# EAGLE board Daughter Card v6 (EAGLE 8.0.2), part 1 of 2
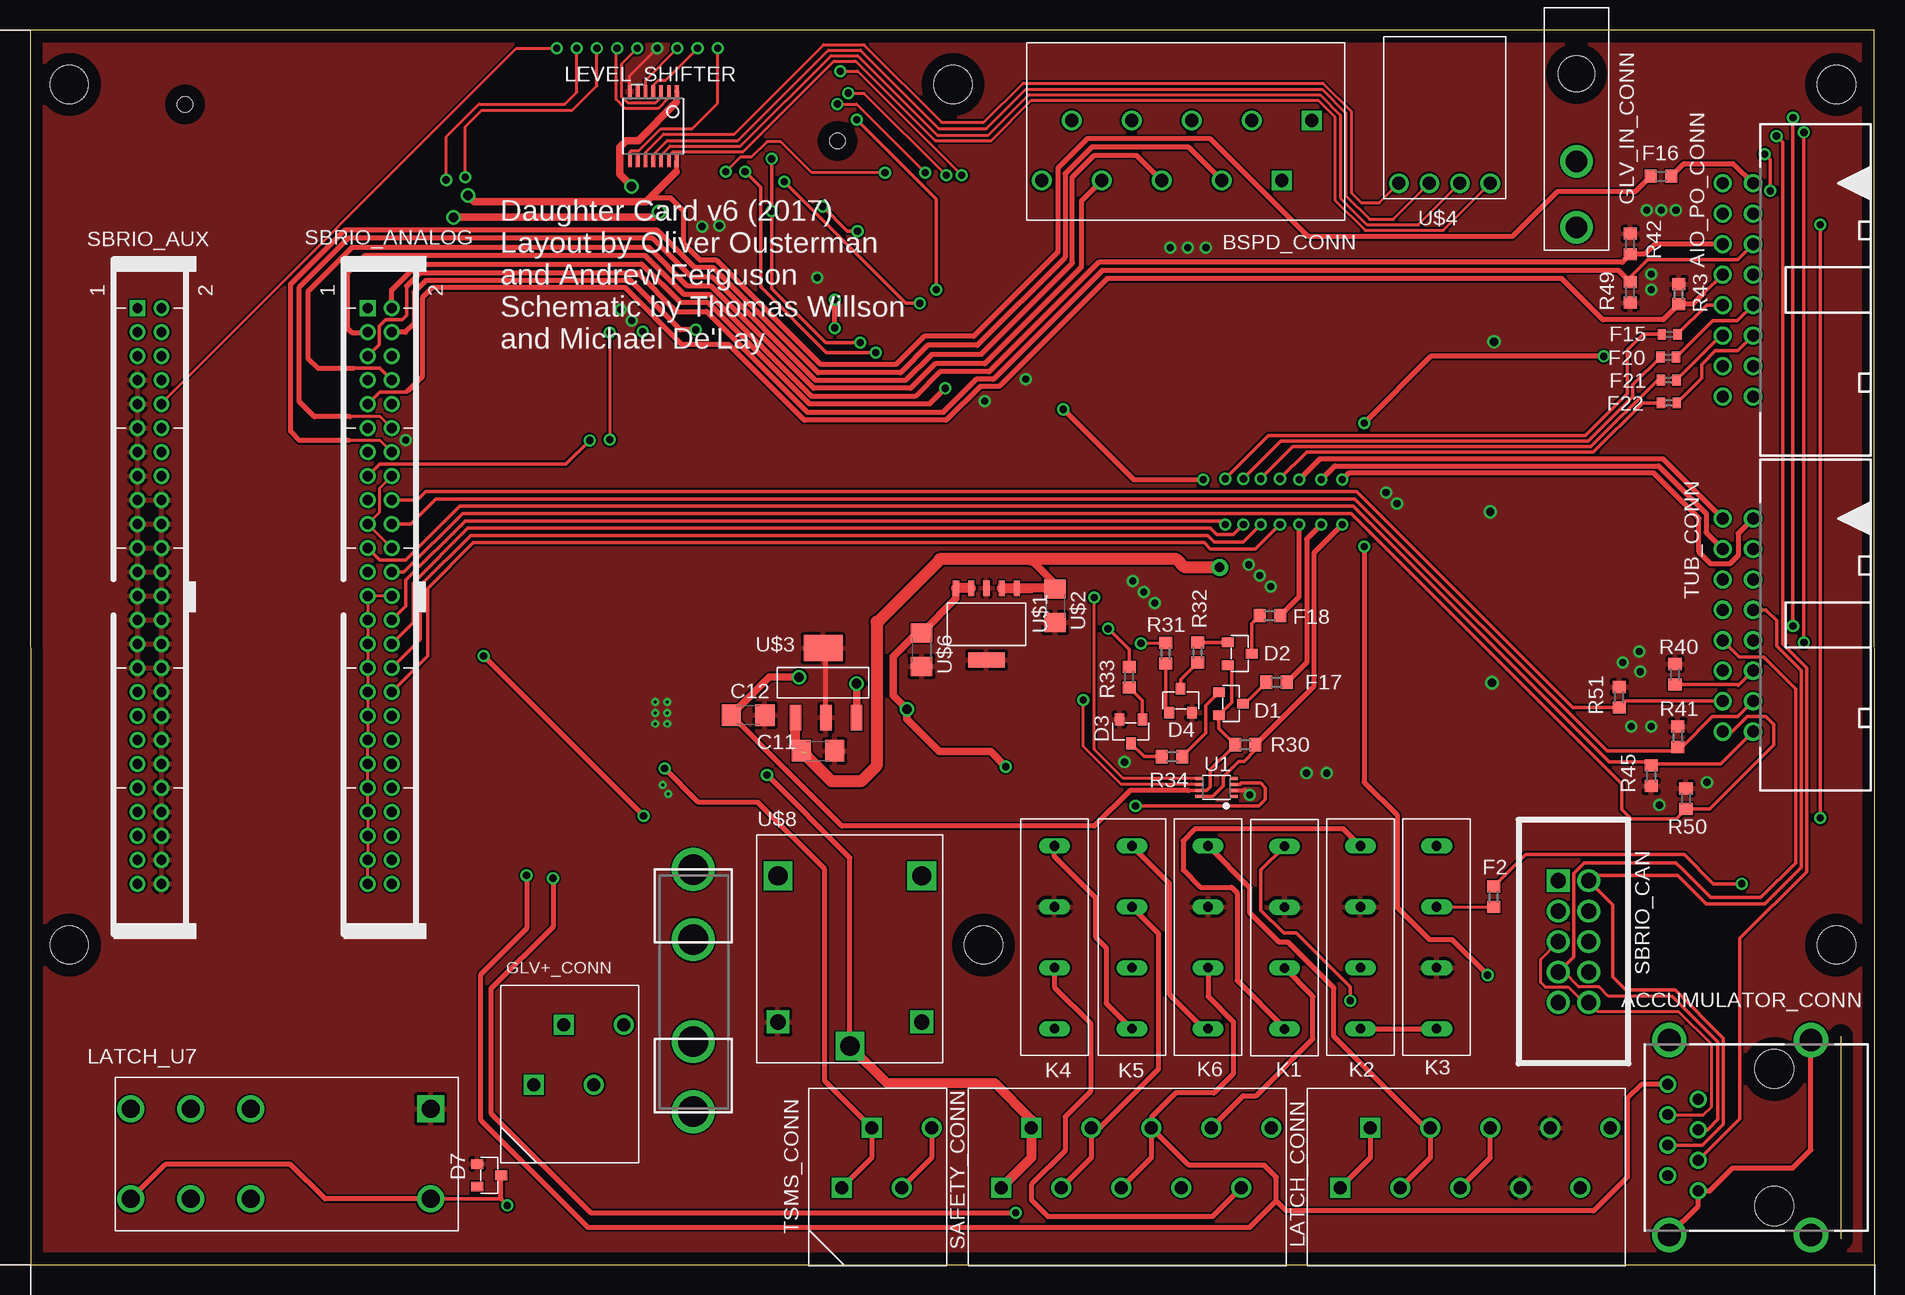
[diagram p0: board, top side]
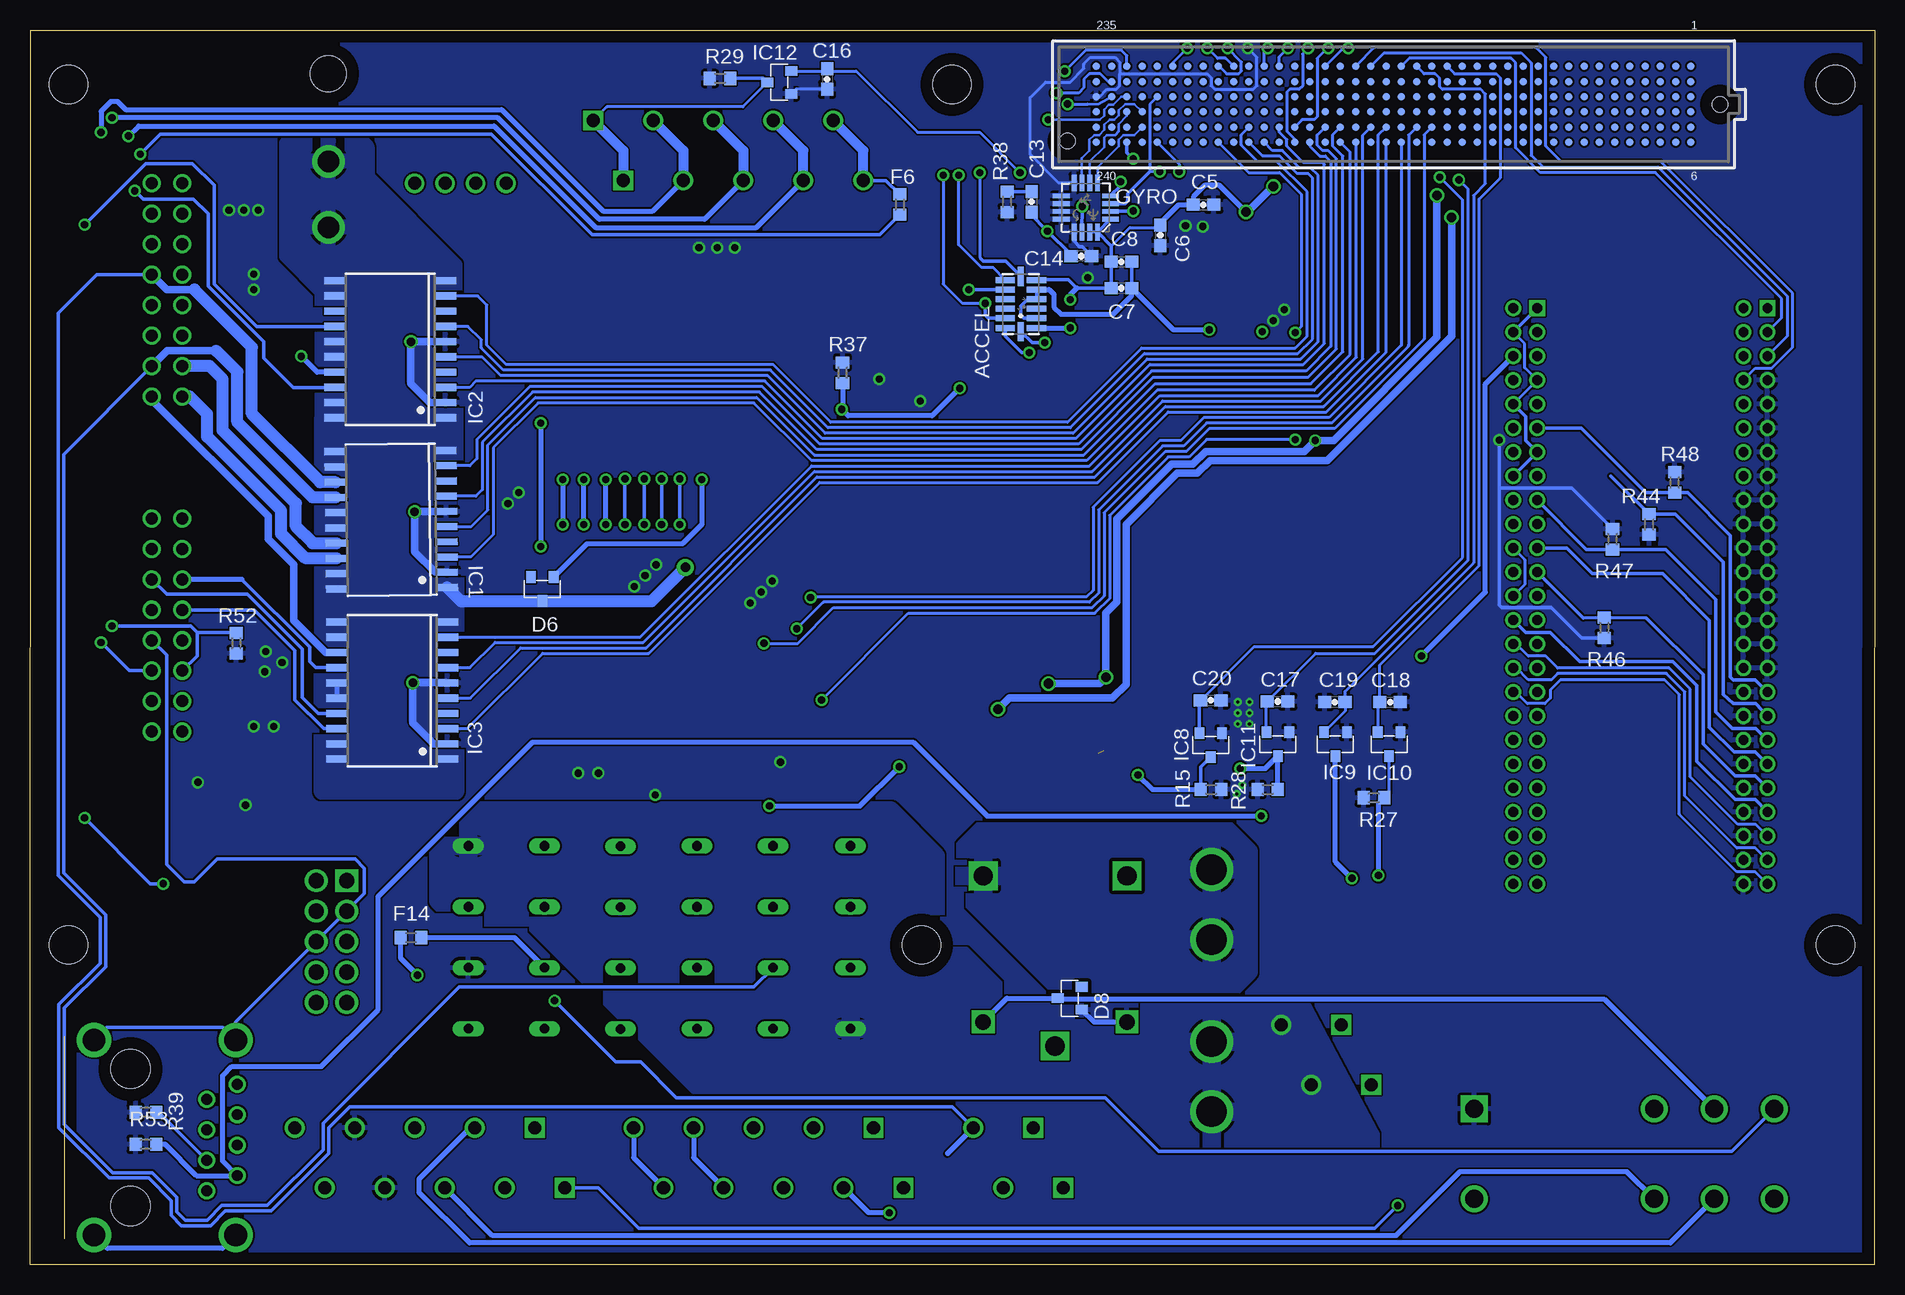
[diagram p1: board, bottom side, seen from below]

Size 153.75 x 102.95 mm. Coordinates in mm from the lower left corner, seen from the top.
Outline: 0.08,0 153.75,0 153.67,102.95 0,102.95 0.08,0
Copper layers (1*16): Top 0.035mm / dielectric 1.5mm / Bottom 0.035mm
Design rules "default *": minimum track width 8mil, minimum drill 13mil, track to track 6mil, track to pad 6mil, pad to pad 6mil, via to via 6mil, smd to smd 6mil, copper to edge 40mil, drill to drill 8mil, minimum pad ring 10mil, minimum via ring 8mil, stop-mask expansion 0mil, vias tented up to drill 0mil, thermal gap 10mil
Holes 3.17 mm at 3.28,98.4 76.91,98.4 150.55,98.4 150.55,26.67 79.45,26.67 3.28,26.67

## Footprints (pad centres in the part's own frame; a part is rotated, then mirrored left to right if it is on the bottom)
LGA14 = smd 0.5 x 1.6: 1 2,1.3; 2 1.2,1.3; 3 0.4,1.3; 4 -0.4,1.3; 5 -1.2,1.3; 6 -2,1.3; 8 -2,-1.3; 9 -1.2,-1.3; 10 -0.4,-1.3; 11 0.4,-1.3; 12 1.2,-1.3; 13 2,-1.3 | smd 1.6 x 0.5: 7 -2.3,0; 14 2.3,0
RJ45-SHIELD1 = drill 0.9 pad 1.4: 1 -4.445,6.35; 2 -3.175,8.89; 3 -1.905,6.35; 4 -0.635,8.89; 5 0.635,6.35; 6 1.905,8.89; 7 3.175,6.35; 8 4.445,8.89 | drill 1.9 pad 2.5: S1 -8.128,-3.048; S2 8.128,-3.048; S3 -8.128,8.76; S4 8.128,8.76 | hole 3.251: -5.715,0; 5.715,0
PAK100/2500-5-16 = drill 1 pad 1.422: 1 -8.89,-1.27; 2 -8.89,1.27; 3 -6.35,-1.27; 4 -6.35,1.27; 5 -3.81,-1.27; 6 -3.81,1.27; 7 -1.27,-1.27; 8 -1.27,1.27; 9 1.27,-1.27; 10 1.27,1.27; 11 3.81,-1.27; 12 3.81,1.27; 13 6.35,-1.27; 14 6.35,1.27; 15 8.89,-1.27; 16 8.89,1.27
CONNECTOR_5 = drill 1.1 square: 1 0,0; 2 2.5,5 | drill 1.1: 3 5,0; 4 7.5,5; 5 10,0; 6 12.5,5; 7 15,0; 8 17.5,5; 9 20,0; 10 22.5,5
0603-CAP = smd 1.1 x 1: 1 -0.85,0; 2 0.85,0
C1206 = smd 1.6 x 1.8: 1 -1.4,0; 2 1.4,0
SOT-23-3 = smd 0.8 x 0.976: P$1 0,1; P$2 -0.95,-1; P$3 0.95,-1
R0603 = smd 1 x 1.1: 1 -0.85,0; 2 0.85,0
FUSE_5MM = drill 2.54 pad 3.556: 1 0,-10.1; 2 0,-4.258; 3 0,4.258; 4 0,10.1
R0402 = smd 0.7 x 0.9: 1 -0.65,0; 2 0.65,0
CONNECTOR_2 = drill 1.1 square: 1 0,0; 2 2.5,5 | drill 1.1: 3 5,0; 4 7.5,5
MOLEX_39-30-1020 = drill 1.8: 1 0,0; 2 0,5.5 | hole 3: 0,-7.3
LGA16-4X4 = smd 1.4 x 0.4: 1 -2.05,0.975; 2 -2.05,0.325; 3 -2.05,-0.325; 4 -2.05,-0.975; 9 2.05,-0.975; 10 2.05,-0.325; 11 2.05,0.325; 12 2.05,0.975 | smd 0.4 x 1.4: 5 -0.975,-2.05; 6 -0.325,-2.05; 7 0.325,-2.05; 8 0.975,-2.05; 13 0.975,2.05; 14 0.325,2.05; 15 -0.325,2.05; 16 -0.975,2.05
PG-DSO-20 = smd 0.6 x 1.8: 1 -5.715,-4.6; 2 -4.445,-4.6; 3 -3.175,-4.6; 4 -1.905,-4.6; 5 -0.635,-4.6; 6 0.635,-4.6; 7 1.905,-4.6; 8 3.175,-4.6; 9 4.445,-4.6; 10 5.715,-4.6; 11 5.715,4.6; 12 4.445,4.6; 13 3.175,4.6; 14 1.905,4.6; 15 0.635,4.6; 16 -0.635,4.6; 17 -1.905,4.6; 18 -3.175,4.6; 19 -4.445,4.6; 20 -5.715,4.6
HE3621A1250_SPST = drill 0.8 long: C+ -2.54,0; C- 2.54,0; S1 -7.62,0; S2 7.62,0
DPDT_JW2_FORM_C = drill 1.5: CENTER_1 -8,3.75; CENTER_2 -8,-3.75; COIL_2 12,-3.75; NC_1 -3,3.75; NC_2 -3,-3.75; NO_1 -13,3.75; NO_2 -13,-3.75 | drill 1.5 square: COIL_1 12,3.75
TSSOP14 = smd 0.305 x 0.991: 1 -1.95,-2.918; 2 -1.3,-2.918; 3 -0.65,-2.918; 4 0,-2.918; 5 0.65,-2.918; 6 1.3,-2.918; 7 1.95,-2.918; 8 1.95,2.918; 9 1.3,2.918; 10 0.65,2.918; 11 0,2.918; 12 -0.65,2.918; 13 -1.3,2.918; 14 -1.95,2.918
SBRIO_J502_J503 = drill 0.8 square: P$1 0,0 | drill 0.8: P$2 0,2; P$3 2,0; P$4 2,2; P$5 4,0; P$6 4,2; P$7 6,0; P$8 6,2; P$9 8,0; P$10 8,2; P$11 10,0; P$12 10,2; P$13 12,0; P$14 12,2; P$15 14,0; P$16 14,2; P$17 16,0; P$18 16,2; P$19 18,0; P$20 18,2; P$21 20,0; P$22 20,2; P$23 22,0; P$24 22,2; P$25 24,0; P$26 24,2; P$27 26,0; P$28 26,2; P$29 28,0; P$30 28,2; P$31 30,0; P$32 30,2; P$33 32,0; P$34 32,2; P$35 34,0; P$36 34,2; P$37 36,0; P$38 36,2; P$39 38,0; P$40 38,2; P$41 40,0; P$42 40,2; P$43 42,0; P$44 42,2; P$45 44,0; P$46 44,2; P$47 46,0; P$48 46,2; P$49 48,0; P$50 48,2
SBRIO_W = drill 1.27 pad 1.778 square: P$1 -5.08,-1.27 | drill 1.27 pad 1.778: P$2 -5.08,1.27; P$3 -2.54,-1.27; P$4 -2.54,1.27; P$5 0,-1.27; P$6 0,1.27; P$7 2.54,-1.27; P$8 2.54,1.27; P$9 5.08,-1.27; P$10 5.08,1.27
SEAM-40-XX.X-XX-06-X-A = smd 0.635 x 0.635: 1 24.765,3.175; 2 24.765,1.905; 3 24.765,0.635; 4 24.765,-0.635; 5 24.765,-1.905; 6 24.765,-3.175; 7 23.495,3.175; 8 23.495,1.905; 9 23.495,0.635; 10 23.495,-0.635; 11 23.495,-1.905; 12 23.495,-3.175; 13 22.225,3.175; 14 22.225,1.905; 15 22.225,0.635; 16 22.225,-0.635; 17 22.225,-1.905; 18 22.225,-3.175; 19 20.955,3.175; 20 20.955,1.905; 21 20.955,0.635; 22 20.955,-0.635; 23 20.955,-1.905; 24 20.955,-3.175; 25 19.685,3.175; 26 19.685,1.905; 27 19.685,0.635; 28 19.685,-0.635; 29 19.685,-1.905; 30 19.685,-3.175; 31 18.415,3.175; 32 18.415,1.905; 33 18.415,0.635; 34 18.415,-0.635; 35 18.415,-1.905; 36 18.415,-3.175; 37 17.145,3.175; 38 17.145,1.905; 39 17.145,0.635; 40 17.145,-0.635; 41 17.145,-1.905; 42 17.145,-3.175; 43 15.875,3.175; 44 15.875,1.905; 45 15.875,0.635; 46 15.875,-0.635; 47 15.875,-1.905; 48 15.875,-3.175; 49 14.605,3.175; 50 14.605,1.905; 51 14.605,0.635; 52 14.605,-0.635; 53 14.605,-1.905; 54 14.605,-3.175; 55 13.335,3.175; 56 13.335,1.905; 57 13.335,0.635; 58 13.335,-0.635; 59 13.335,-1.905; 60 13.335,-3.175; 61 12.065,3.175; 62 12.065,1.905; 63 12.065,0.635; 64 12.065,-0.635; 65 12.065,-1.905; 66 12.065,-3.175; 67 10.795,3.175; 68 10.795,1.905; 69 10.795,0.635; 70 10.795,-0.635; 71 10.795,-1.905; 72 10.795,-3.175; 73 9.525,3.175; 74 9.525,1.905; 75 9.525,0.635; 76 9.525,-0.635; 77 9.525,-1.905; 78 9.525,-3.175; 79 8.255,3.175; 80 8.255,1.905; 81 8.255,0.635; 82 8.255,-0.635; 83 8.255,-1.905; 84 8.255,-3.175; 85 6.985,3.175; 86 6.985,1.905; 87 6.985,0.635; 88 6.985,-0.635; 89 6.985,-1.905; 90 6.985,-3.175; 91 5.715,3.175; 92 5.715,1.905; 93 5.715,0.635; 94 5.715,-0.635; 95 5.715,-1.905; 96 5.715,-3.175; 97 4.445,3.175; 98 4.445,1.905; 99 4.445,0.635; 100 4.445,-0.635; 101 4.445,-1.905; 102 4.445,-3.175; 103 3.175,3.175; 104 3.175,1.905; 105 3.175,0.635; 106 3.175,-0.635; 107 3.175,-1.905; 108 3.175,-3.175; 109 1.905,3.175; 110 1.905,1.905; 111 1.905,0.635; 112 1.905,-0.635; 113 1.905,-1.905; 114 1.905,-3.175; 115 0.635,3.175; 116 0.635,1.905; 117 0.635,0.635; 118 0.635,-0.635; 119 0.635,-1.905; 120 0.635,-3.175; 121 -0.635,3.175; 122 -0.635,1.905; 123 -0.635,0.635; 124 -0.635,-0.635; 125 -0.635,-1.905; 126 -0.635,-3.175; 127 -1.905,3.175; 128 -1.905,1.905; 129 -1.905,0.635; 130 -1.905,-0.635; 131 -1.905,-1.905; 132 -1.905,-3.175; 133 -3.175,3.175; 134 -3.175,1.905; 135 -3.175,0.635; 136 -3.175,-0.635; 137 -3.175,-1.905; 138 -3.175,-3.175; 139 -4.445,3.175; 140 -4.445,1.905; 141 -4.445,0.635; 142 -4.445,-0.635; 143 -4.445,-1.905; 144 -4.445,-3.175; 145 -5.715,3.175; 146 -5.715,1.905; 147 -5.715,0.635; 148 -5.715,-0.635; 149 -5.715,-1.905; 150 -5.715,-3.175; 151 -6.985,3.175; 152 -6.985,1.905; 153 -6.985,0.635; 154 -6.985,-0.635; 155 -6.985,-1.905; 156 -6.985,-3.175; 157 -8.255,3.175; 158 -8.255,1.905; 159 -8.255,0.635; 160 -8.255,-0.635; 161 -8.255,-1.905; 162 -8.255,-3.175; 163 -9.525,3.175; 164 -9.525,1.905; 165 -9.525,0.635; 166 -9.525,-0.635; 167 -9.525,-1.905; 168 -9.525,-3.175; 169 -10.795,3.175; 170 -10.795,1.905; 171 -10.795,0.635; 172 -10.795,-0.635; 173 -10.795,-1.905; 174 -10.795,-3.175; 175 -12.065,3.175; 176 -12.065,1.905; 177 -12.065,0.635; 178 -12.065,-0.635; 179 -12.065,-1.905; 180 -12.065,-3.175; 181 -13.335,3.175; 182 -13.335,1.905; 183 -13.335,0.635; 184 -13.335,-0.635; 185 -13.335,-1.905; 186 -13.335,-3.175; 187 -14.605,3.175; 188 -14.605,1.905; 189 -14.605,0.635; 190 -14.605,-0.635; 191 -14.605,-1.905; 192 -14.605,-3.175; 193 -15.875,3.175; 194 -15.875,1.905; 195 -15.875,0.635; 196 -15.875,-0.635; 197 -15.875,-1.905; 198 -15.875,-3.175; 199 -17.145,3.175; 200 -17.145,1.905; 201 -17.145,0.635; 202 -17.145,-0.635; 203 -17.145,-1.905; 204 -17.145,-3.175; 205 -18.415,3.175; 206 -18.415,1.905; 207 -18.415,0.635; 208 -18.415,-0.635; 209 -18.415,-1.905; 210 -18.415,-3.175; 211 -19.685,3.175; 212 -19.685,1.905; 213 -19.685,0.635; 214 -19.685,-0.635; 215 -19.685,-1.905; 216 -19.685,-3.175; 217 -20.955,3.175; 218 -20.955,1.905; 219 -20.955,0.635; 220 -20.955,-0.635; 221 -20.955,-1.905; 222 -20.955,-3.175; 223 -22.225,3.175; 224 -22.225,1.905; 225 -22.225,0.635; 226 -22.225,-0.635; 227 -22.225,-1.905; 228 -22.225,-3.175; 229 -23.495,3.175; 230 -23.495,1.905; 231 -23.495,0.635; 232 -23.495,-0.635; 233 -23.495,-1.905; 234 -23.495,-3.175; 235 -24.765,3.175; 236 -24.765,1.905; 237 -24.765,0.635; 238 -24.765,-0.635; 239 -24.765,-1.905; 240 -24.765,-3.175 | hole 1.27: 27.191,0; -27.191,-3.048
VFSOP-8 = smd 0.25 x 0.65: P$1 -0.75,-1.45; P$2 -0.25,-1.45; P$3 0.25,-1.45; P$4 0.75,-1.45; P$5 0.75,1.45; P$6 0.25,1.45; P$7 -0.25,1.45; P$8 -0.75,1.45
TPS7A4533 = smd 0.508 x 1.27: P$1 -2.54,-2.997; P$2 -1.27,-2.997; P$3 0,-2.997; P$4 1.27,-2.997; P$5 2.54,-2.997 | smd 3.048 x 1.27: P$6 0,2.997
SOT-223-4 = smd 0.95 x 2.15: 1 -2.3,-2.9; 2 0.24,-2.9; 3 2.78,-2.9 | smd 3.25 x 2.15: 4 0,2.9
MOLEX_70553-0038 = drill 1.09: 1 -3.81,0; 2 -1.27,0; 3 1.27,0; 4 3.81,0
RELAY = drill 1.6 square: A 14.199,-5.994; B 14.199,5.994; CENTER 0,0 | drill 1.27 square: V1 2.007,5.994; V2 2.007,-5.994

## Placement (x,y rotation side)
ACCEL  ADXL345  [LGA14]  71.17,80.11 270 bottom
ACCUMULATOR_CONN  RJ45-6L21-S  [RJ45-SHIELD1]  145.36,10.62 90 top
AIO_PO_CONN  2516-5  [PAK100/2500-5-16]  142.32,81.28 270 top
BSPD_CONN  CONN_5  [CONNECTOR_5]  106.81,95.4 180 top
C5  .1uF  [0603-CAP]  55.96,88.37 0 bottom
C6  10uF  [0603-CAP]  59.56,85.83 270 bottom
C7  .1uF  [0603-CAP]  62.79,81.43 0 bottom
C8  1uF  [0603-CAP]  62.79,83.62 0 bottom
C11  0.1uF  [C1206]  65.66,42.85 0 top
C12  0.22uF  [C1206]  59.84,45.82 180 top
C13  470nF  [0603-CAP]  70.28,88.62 270 bottom
C14  10nF  [0603-CAP]  66.14,84.1 180 bottom
C16  1uF  [0603-CAP]  87.33,98.86 270 bottom
C17  1uF  [0603-CAP]  49.78,46.96 0 bottom
C18  1uF  [0603-CAP]  40.41,46.91 0 bottom
C19  1uF  [0603-CAP]  45.01,46.91 180 bottom
C20  1uF  [0603-CAP]  55.35,47.07 0 bottom
D1  MMBT4403-7-F  [SOT-23-3]  100.08,46.79 270 top
D2  MMBT4403-7-F  [SOT-23-3]  100.81,50.95 270 top
D3  MMBT4401-7-F  [SOT-23-3]  91.74,44.48 180 top
D4  MMBT4401-7-F  [SOT-23-3]  95.89,47.04 0 top
D6  MMBZ5238B-7-F  [SOT-23-3]  111.05,56.34 180 bottom
D7  DIODE_MMBD4448  [SOT-23-3]  38.28,7.47 270 top
D8  DIODE_MMBD4448  [SOT-23-3]  67.11,22.23 90 bottom
F2  250mA  [R0603]  121.97,30.68 270 top
F3  FUSEX20MM  [FUSE_5MM]  55.27,22.86 180 top
F6  250mA  [R0603]  81.25,88.39 270 bottom
F14  250mA  [R0603]  122,27.28 0 bottom
F15  10mA PTC  [R0402]  136.63,77.57 0 top
F16  0.5A PTC  [R0603]  135.92,90.75 0 top
F17  1A PTC  [R0603]  103.89,48.56 180 top
F18  1A PTC  [R0603]  103.33,54.13 180 top
F20  10mA PTC  [R0402]  136.53,75.67 0 top
F21  10mA PTC  [R0402]  136.55,73.76 0 top
F22  10mA PTC  [R0402]  136.58,71.86 0 top
GLV+_CONN  CONN_2  [CONNECTOR_2]  41.99,15.01 0 top
GLV_IN_CONN  39-30-1020  [MOLEX_39-30-1020]  128.88,92 180 top
GYRO  L3G4200D  [LGA16-4X4]  65.76,88.14 180 bottom
IC1  BTS716G  [PG-DSO-20]  123.65,62.13 90.7 bottom
IC2  BTS716G  [PG-DSO-20]  123.72,76.33 90 bottom
IC3  BTS716G  [PG-DSO-20]  123.57,47.88 90 bottom
IC8  MIC5225-3.3YM5-TR  [SOT-23-3]  55.35,43.33 180 bottom
IC9  MIC5225-3.3YM5-TR  [SOT-23-3]  44.96,43.41 180 bottom
IC10  MIC5225-3.3YM5-TR  [SOT-23-3]  40.49,43.41 180 bottom
IC11  MIC5225-3.3YM5-TR  [SOT-23-3]  49.76,43.41 180 bottom
IC12  MIC5225-3.3YM5-TR  [SOT-23-3]  91.31,98.58 90 bottom
K1  HE3621A1250_SPST  [HE3621A1250_SPST]  104.55,27.28 90 top
K2  HE3621A1250_SPST  [HE3621A1250_SPST]  110.87,27.3 90 top
K3  HE3621A1250_SPST  [HE3621A1250_SPST]  117.22,27.3 270 top
K4  HE3621A1250_SPST  [HE3621A1250_SPST]  85.37,27.3 90 top
K5  HE3621A1250_SPST  [HE3621A1250_SPST]  91.82,27.3 90 top
K6  HE3621A1250_SPST  [HE3621A1250_SPST]  98.17,27.3 90 top
LATCH_CONN  CONN_5  [CONNECTOR_5]  109.19,6.43 0 top
LATCH_U7  JW2SN-DC12V  [DPDT_JW2_FORM_C]  21.39,9.25 0 top
LEVEL_SHIFTER  [TSSOP14]  51.94,94.92 180 top
R15  10K  [R0603]  55.32,39.62 0 bottom
R27  10K  [R0603]  41.76,38.94 180 bottom
R28  10K  [R0603]  50.6,39.62 180 bottom
R29  10K  [R0603]  96.24,98.91 180 bottom
R30  4.7K  [R0603]  101.27,43.36 180 top
R31  4.7K  [R0603]  94.64,50.98 270 top
R32  4.7K  [R0603]  97.31,51.05 90 top
R33  4.7K  [R0603]  91.59,49 270 top
R34  4.7K  [R0603]  95.17,42.37 0 top
R37  10K  [R0603]  86.03,74.37 270 bottom
R38  10K  [R0603]  72.31,88.62 270 bottom
R39  100k  [R0603]  144.09,12.73 180 bottom
R40  100k  [R0603]  137.08,49.23 90 top
R41  100k  [R0603]  137.31,44.04 90 top
R42  100k  [R0603]  133.35,85.12 90 top
R43  100k  [R0603]  137.39,80.92 90 top
R44  100k  [R0603]  18.82,61.72 270 bottom
R45  100k  [R0603]  135.1,40.77 270 top
R46  100k  [R0603]  22.56,53.11 90 bottom
R47  100k  [R0603]  21.87,60.5 270 bottom
R48  100k  [R0603]  16.69,65.23 270 bottom
R49  100k  [R0603]  133.35,81.08 90 top
R50  100k  [R0603]  138,38.86 270 top
R51  100k  [R0603]  132.44,47.32 270 top
R52  100k  [R0603]  136.55,51.82 90 bottom
R53  100k  [R0603]  144.09,10.06 0 bottom
SAFETY_CONN  CONN_5  [CONNECTOR_5]  80.95,6.43 0 top
SBRIO_ANALOG  SBRIO_MIO  [SBRIO_J502_J503]  28.14,79.76 270 top
SBRIO_AUX  SBRIO_AUX  [SBRIO_J502_J503]  8.97,79.76 270 top
SBRIO_CAN  SBRIO_W500  [SBRIO_W]  128.63,26.95 270 top
SBRIO_MEZZANINE  SBRIO_RMC  [SEAM-40-XX.X-XX-06-X-A]  40.11,96.75 0 bottom
TSMS_CONN  CONN_2  [CONNECTOR_2]  67.64,6.43 0 top
TUB_CONN  2516-5  [PAK100/2500-5-16]  142.32,53.34 270 top
U1  [VFSOP-8]  98.88,39.8 90 top
U$1  TPS7A4533  [TPS7A4533]  79.71,53.42 180 top
U$2  [C1206]  85.42,54.94 270 top
U$3  LM340MP-5.0  [SOT-223-4]  66.09,48.51 0 top
U$4  70553-0038  [MOLEX_70553-0038]  117.88,90.17 180 top
U$6  [C1206]  74.3,51.28 270 top
U$8  RELAY  [RELAY]  68.33,18.24 90 top

## Library data of the parts
ACCEL GYRO = SparkFun-Sensors
ACCUMULATOR_CONN = con-tycoelectronics; OC_FARNELL: unknown; OC_NEWARK: unknown
AIO_PO_CONN TUB_CONN = con-3m; MPN: D2516-5002-AR; OC_FARNELL: 9838376; OC_NEWARK: 12P7055
BSPD_CONN D1-D4 D6-D8 GLV+_CONN K1-K6 LATCH_CONN LATCH_U7 SAFETY_CONN SBRIO_ANALOG SBRIO_AUX SBRIO_CAN TSMS_CONN U$8 = formula electric
C5-C8 C13 C14 C16-C20 F3 = SparkFun-Passives
C11 C12 U$2 U$6 = rcl
F2 F6 F14-F18 F20-F22 R15 R27-R34 R37-R53 = resistor
GLV_IN_CONN U$4 = molex
IC1-IC3 = infineon; OC_FARNELL: unknown; OC_NEWARK: unknown
IC8-IC12 = formula electric; DIGIKEYPN: MCP1703T-3302E/CBCT-ND
LEVEL_SHIFTER = SparkFun-DigitalIC
SBRIO_MEZZANINE = SEAM-40-XX.X-XX-06-X-A
U1 = adafruit
U$1 = Texas Instruments_By_element14_Batch_1; DIGIKEY_P-N: 490-12344-1-ND; P-N: GRT21BC81C106ME01L
U$3 = texas

## Nets
3.3V: ACCEL.1 ACCEL.6 C5.1 C6.1 C7.1 C8.1 GYRO.1 GYRO.15 GYRO.16 LEVEL_SHIFTER.1 U1.P$3 U$1.P$4 U$1.P$5 U$6.1
5V: C12.2 D1.P$3 D2.P$3 F16.1 LEVEL_SHIFTER.14 R30.2 SBRIO_ANALOG.P$15 U1.P$7 U$3.3
5V_IO_1: F17.1 TUB_CONN.3
12V: C11.1 D6.P$1 GLV_IN_CONN.1 GLV_IN_CONN.2 IC1.1 IC1.10 IC1.11 IC1.12 IC1.15 IC1.16 IC1.19 IC1.20 IC2.1 IC2.10 IC2.11 IC2.12 IC2.15 IC2.16 IC2.19 IC2.20 IC3.1 IC3.10 IC3.11 IC3.12 IC3.15 IC3.16 IC3.19 IC3.20 U$1.P$1 U$1.P$2 U$2.1 U$3.1
ACCUMULATOR_FANS: AIO_PO_CONN.15 IC1.18
AI7: R50.2 SBRIO_ANALOG.P$24 TUB_CONN.15
AI8: AIO_PO_CONN.5 R42.1 SBRIO_ANALOG.P$3
AI9: AIO_PO_CONN.6 R49.2 SBRIO_ANALOG.P$5
AI10: AIO_PO_CONN.7 R43.1 SBRIO_ANALOG.P$9
AI11: R48.2 SBRIO_ANALOG.P$11 SBRIO_AUX.P$33
AI12: R44.1 SBRIO_AUX.P$35
AI13: R47.2 SBRIO_ANALOG.P$17 SBRIO_AUX.P$37
AI15: R46.2 SBRIO_ANALOG.P$23 SBRIO_AUX.P$41
AMS_OK-: IC9.P$1 K5.C- SAFETY_CONN.3 SAFETY_CONN.4
AO0: F15.1 SBRIO_ANALOG.P$28 SBRIO_AUX.P$43
AO1: F20.1 SBRIO_ANALOG.P$30 SBRIO_AUX.P$45
AO2: F21.1 SBRIO_ANALOG.P$32 SBRIO_AUX.P$47
AO3: F22.1 SBRIO_ANALOG.P$34 SBRIO_AUX.P$49
BRAKE_PRESS_IN_1: BSPD_CONN.5 BSPD_CONN.6 R52.2 SBRIO_ANALOG.P$12 TUB_CONN.11
BRAKE_PRESS_IN_2: BSPD_CONN.3 BSPD_CONN.4 R40.1 SBRIO_ANALOG.P$14 TUB_CONN.12
BRAKELIGHT: IC3.17 TUB_CONN.6
BSPD_OK+: K4.C+ SAFETY_CONN.9 SAFETY_CONN.10
BSPD_OK_IN: BSPD_CONN.1 BSPD_CONN.2 IC12.P$1 R29.1
BUZZER_OUT: IC3.18 TUB_CONN.7
CAN_GND: ACCUMULATOR_CONN.1 ACCUMULATOR_CONN.S1 ACCUMULATOR_CONN.S2 ACCUMULATOR_CONN.S3 ACCUMULATOR_CONN.S4 SBRIO_CAN.P$3 SBRIO_CAN.P$6 TUB_CONN.10
CAN_H: ACCUMULATOR_CONN.5 SBRIO_CAN.P$7 TUB_CONN.9
CAN_L: ACCUMULATOR_CONN.4 SBRIO_CAN.P$2 TUB_CONN.8
COOLANT_PUMP: AIO_PO_CONN.13 IC1.17
DC_DC_DISABLE: F18.1 TUB_CONN.1
DIO0: ACCEL.14 GYRO.2 SBRIO_MEZZANINE.228
DIO1: C16.1 IC12.P$3 SBRIO_MEZZANINE.216
DIO2: SBRIO_MEZZANINE.210
DIO3: SBRIO_MEZZANINE.198
DIO4: SBRIO_MEZZANINE.192 U1.P$6
DIO5: IC2.7 SBRIO_MEZZANINE.180
DIO6: IC2.5 SBRIO_MEZZANINE.174
DIO7: C20.1 IC8.P$3 SBRIO_MEZZANINE.162
DIO8: IC1.9 SBRIO_MEZZANINE.156
DIO9: IC1.3 SBRIO_MEZZANINE.144
DIO10: IC3.9 SBRIO_MEZZANINE.138
DIO11: IC3.3 SBRIO_MEZZANINE.126
DIO12: SBRIO_MEZZANINE.120 U1.P$5
DIO13: SBRIO_MEZZANINE.108
DIO14: SBRIO_MEZZANINE.102
DIO15: SBRIO_MEZZANINE.90
DIO16: ACCEL.7 SBRIO_MEZZANINE.231
DIO17: ACCEL.9 SBRIO_MEZZANINE.225
DIO18: ACCEL.13 GYRO.3 SBRIO_MEZZANINE.213
DIO19: SBRIO_MEZZANINE.207
DIO20: SBRIO_MEZZANINE.195
DIO21: SBRIO_MEZZANINE.189
DIO22: SBRIO_MEZZANINE.177
DIO23: SBRIO_MEZZANINE.171
DIO24: SBRIO_MEZZANINE.159
DIO25: SBRIO_MEZZANINE.153
DIO26: SBRIO_MEZZANINE.141
DIO27: SBRIO_MEZZANINE.135
DIO28: SBRIO_MEZZANINE.123
DIO29: SBRIO_MEZZANINE.117
DIO30: SBRIO_MEZZANINE.105
DIO31: SBRIO_MEZZANINE.99
DIO32: GYRO.5 SBRIO_MEZZANINE.221
DIO33: SBRIO_MEZZANINE.215
DIO34: SBRIO_MEZZANINE.203
DIO35: SBRIO_MEZZANINE.197
DIO36: SBRIO_MEZZANINE.185
DIO37: IC2.9 SBRIO_MEZZANINE.179
DIO38: IC2.3 SBRIO_MEZZANINE.167
DIO39: C17.1 IC11.P$3 SBRIO_MEZZANINE.161
DIO40: IC1.7 SBRIO_MEZZANINE.149
DIO41: IC1.5 SBRIO_MEZZANINE.143
DIO42: IC3.7 SBRIO_MEZZANINE.131
DIO43: IC3.5 SBRIO_MEZZANINE.125
DIO44: R33.1 SBRIO_MEZZANINE.113
DIO45: R31.1 SBRIO_MEZZANINE.107
DIO48: ACCEL.8 SBRIO_MEZZANINE.230
DIO64: GYRO.6 SBRIO_MEZZANINE.226
DIO65: GYRO.7 SBRIO_MEZZANINE.220
DIO80: SBRIO_MEZZANINE.235
DIO81: ACCEL.12 GYRO.4 SBRIO_MEZZANINE.223
DIO82: SBRIO_MEZZANINE.217
DIO83: LEVEL_SHIFTER.8 SBRIO_MEZZANINE.205
DIO84: SBRIO_MEZZANINE.199
DIO85: LEVEL_SHIFTER.5 SBRIO_MEZZANINE.187
DIO86: LEVEL_SHIFTER.4 SBRIO_MEZZANINE.181
DIO87: LEVEL_SHIFTER.3 SBRIO_MEZZANINE.169
DIO88: LEVEL_SHIFTER.2 SBRIO_MEZZANINE.163
DIO89: SBRIO_AUX.P$12
DIO90: SBRIO_AUX.P$10 SBRIO_MEZZANINE.145
DIO91: SBRIO_AUX.P$8 SBRIO_MEZZANINE.133
DIO92: SBRIO_AUX.P$5 SBRIO_MEZZANINE.127
DIO93: SBRIO_AUX.P$3 SBRIO_MEZZANINE.115
DIO94: C19.1 IC9.P$3 SBRIO_MEZZANINE.109
DIO95: C18.1 IC10.P$3 SBRIO_MEZZANINE.97
DIO_GND: ACCEL.2 ACCEL.4 ACCEL.5 C7.2 C8.2 SBRIO_ANALOG.P$1 SBRIO_ANALOG.P$4 SBRIO_ANALOG.P$7 SBRIO_ANALOG.P$10 SBRIO_ANALOG.P$13 SBRIO_ANALOG.P$16 SBRIO_ANALOG.P$19 SBRIO_ANALOG.P$22 SBRIO_ANALOG.P$25 SBRIO_ANALOG.P$26 SBRIO_ANALOG.P$27 SBRIO_ANALOG.P$29 SBRIO_ANALOG.P$31 SBRIO_ANALOG.P$33 SBRIO_ANALOG.P$35 SBRIO_ANALOG.P$37 SBRIO_ANALOG.P$39 SBRIO_ANALOG.P$41 SBRIO_ANALOG.P$43 SBRIO_ANALOG.P$45 SBRIO_ANALOG.P$47 SBRIO_ANALOG.P$49
FAN_PWM_OUT: AIO_PO_CONN.16 IC3.13
GLV+: F3.3 F3.4 GLV+_CONN.3 GLV+_CONN.4 K3.S1 K4.S1
GND: C5.2 C6.2 C11.2 C12.1 C14.1 C16.2 C17.2 C18.2 C19.2 C20.2 D3.P$3 D4.P$3 D7.P$2 D8.P$2 GYRO.8 GYRO.9 GYRO.10 GYRO.11 GYRO.12 GYRO.13 IC1.2 IC1.6 IC2.2 IC2.6 IC3.2 IC3.6 IC8.P$2 IC9.P$2 IC10.P$2 IC11.P$2 IC12.P$2 K1.C- K2.C- K3.C- K4.C- K6.C- LATCH_CONN.7 LATCH_CONN.8 LATCH_U7.COIL_1 LEVEL_SHIFTER.7 R15.2 R27.2 R28.2 R29.2 R37.1 R38.2 R39.2 R40.2 R41.2 R42.2 R43.2 R44.2 R45.2 R46.1 R47.1 R48.1 R49.1 R50.1 R51.1 R52.1 R53.1 SBRIO_AUX.P$7 SBRIO_AUX.P$9 SBRIO_AUX.P$11 SBRIO_AUX.P$13 SBRIO_AUX.P$15 SBRIO_AUX.P$17 SBRIO_AUX.P$18 SBRIO_AUX.P$19 SBRIO_AUX.P$20 SBRIO_AUX.P$21 SBRIO_AUX.P$22 SBRIO_AUX.P$23 SBRIO_AUX.P$24 SBRIO_AUX.P$25 SBRIO_AUX.P$26 SBRIO_AUX.P$27 SBRIO_AUX.P$28 SBRIO_AUX.P$29 SBRIO_AUX.P$30 SBRIO_AUX.P$31 SBRIO_AUX.P$32 SBRIO_AUX.P$34 SBRIO_AUX.P$36 SBRIO_AUX.P$38 SBRIO_AUX.P$40 SBRIO_AUX.P$42 SBRIO_AUX.P$44 SBRIO_AUX.P$46 SBRIO_AUX.P$48 SBRIO_AUX.P$50 SBRIO_MEZZANINE.237 U1.P$2 U$1.P$3 U$1.P$6 U$2.2 U$3.2 U$3.4 U$6.2 U$8.V1
HIGH_CURRENT_IN: ACCUMULATOR_CONN.3 BSPD_CONN.7 BSPD_CONN.8 R39.1 SBRIO_ANALOG.P$8
IMD_OK+: ACCUMULATOR_CONN.8 IC10.P$1 K6.C+ R27.1 SAFETY_CONN.5 SAFETY_CONN.6
INTER_OK+: K1.C+ SAFETY_CONN.7 SAFETY_CONN.8
K4: K4.S2 K5.S1
LAP_TIMER_IN: R30.1 TUB_CONN.2 U1.P$8
LATCH_LED+: LATCH_CONN.5 LATCH_CONN.6 LATCH_U7.NC_2
LATCH_SW_IN: D7.P$1 LATCH_CONN.1 LATCH_CONN.2 LATCH_U7.COIL_2 LATCH_U7.NO_2
LATCH_SW_OUT: K6.S2 LATCH_CONN.3 LATCH_CONN.4 LATCH_U7.CENTER_2
LOW_CURRENT_IN: ACCUMULATOR_CONN.2 R53.2 SBRIO_ANALOG.P$6
N$2: K2.S1 K3.S2
N$3: AIO_PO_CONN.9 F15.2
N$4: D6.P$2 R37.2 SBRIO_ANALOG.P$2
N$6: AIO_PO_CONN.10 F20.2
N$7: K1.S1 K2.S2
N$9: AIO_PO_CONN.11 F21.2
N$10: AIO_PO_CONN.12 F22.2
N$13: K5.S2 K6.S1
N$14: F3.1 F3.2 U$8.A
N$18: D4.P$1 R32.1
N$19: D4.P$2 R31.2
N$20: AIO_PO_CONN.2 F16.2
N$22: D3.P$2 R33.2
N$23: D1.P$2 R34.2
N$24: D3.P$1 R34.1
N$25: C13.1 R38.1
N$29: AIO_PO_CONN.3
N$37: C13.2 C14.2 GYRO.14
N$56: D1.P$1 F17.2
N$57: D2.P$1 F18.2
N$58: D2.P$2 R32.2
PO2: IC3.14 TUB_CONN.5
PO3: AIO_PO_CONN.14 IC1.14 K5.C+
PRECHARGE_DONE+: AIO_PO_CONN.8 IC1.13 TSMS_CONN.3 TSMS_CONN.4
SBRIO_OK+_1: F2.1 IC2.14
SBRIO_OK+_1_RELAY_IN: F2.2 K3.C+
SBRIO_OK+_2: F14.1 IC2.17
SBRIO_OK_2_RELAY: F14.2 K2.C+
SHIELD: ACCUMULATOR_CONN.6 SBRIO_CAN.P$5 SBRIO_CAN.P$10
SHUTDOWN_3: IC2.13
SHUTDOWN_OK+: K1.S2 LATCH_U7.NO_1
STEERING_POS: R45.1 SBRIO_ANALOG.P$21 SBRIO_AUX.P$39 TUB_CONN.16
THROTTLE_IN_1: R51.2 SBRIO_ANALOG.P$18 TUB_CONN.13
THROTTLE_IN_2: R41.1 SBRIO_ANALOG.P$20 TUB_CONN.14
THROTTLE_OK_OUT: F6.2 IC2.18
THROTTLE_OK_OUT_FUSED: BSPD_CONN.9 BSPD_CONN.10 F6.1
TSMS_IN+: IC11.P$1 R28.1 TSMS_CONN.1 TSMS_CONN.2
TSMS_OUT+: IC8.P$1 R15.1 SAFETY_CONN.1 SAFETY_CONN.2 U$8.CENTER
TSMS_OUT_CTRL+: D8.P$1 LATCH_U7.CENTER_1 U$8.V2
VCC: SBRIO_MEZZANINE.236
WS1: LEVEL_SHIFTER.13 U$4.1
WS2: LEVEL_SHIFTER.12 U$4.2
WS3: LEVEL_SHIFTER.11 U$4.3
WS4: LEVEL_SHIFTER.10 U$4.4